# Altium PCB SolarpanelZPlus.PcbDoc
Units mm, origin at the board's own origin, x right, y up, seen from the top; angles counter-clockwise.
Board outline 80 x 60 mm, 2 copper layers (Top Layer, Bottom Layer); 2 components, 3 nets, 9 pads, 5 vias.
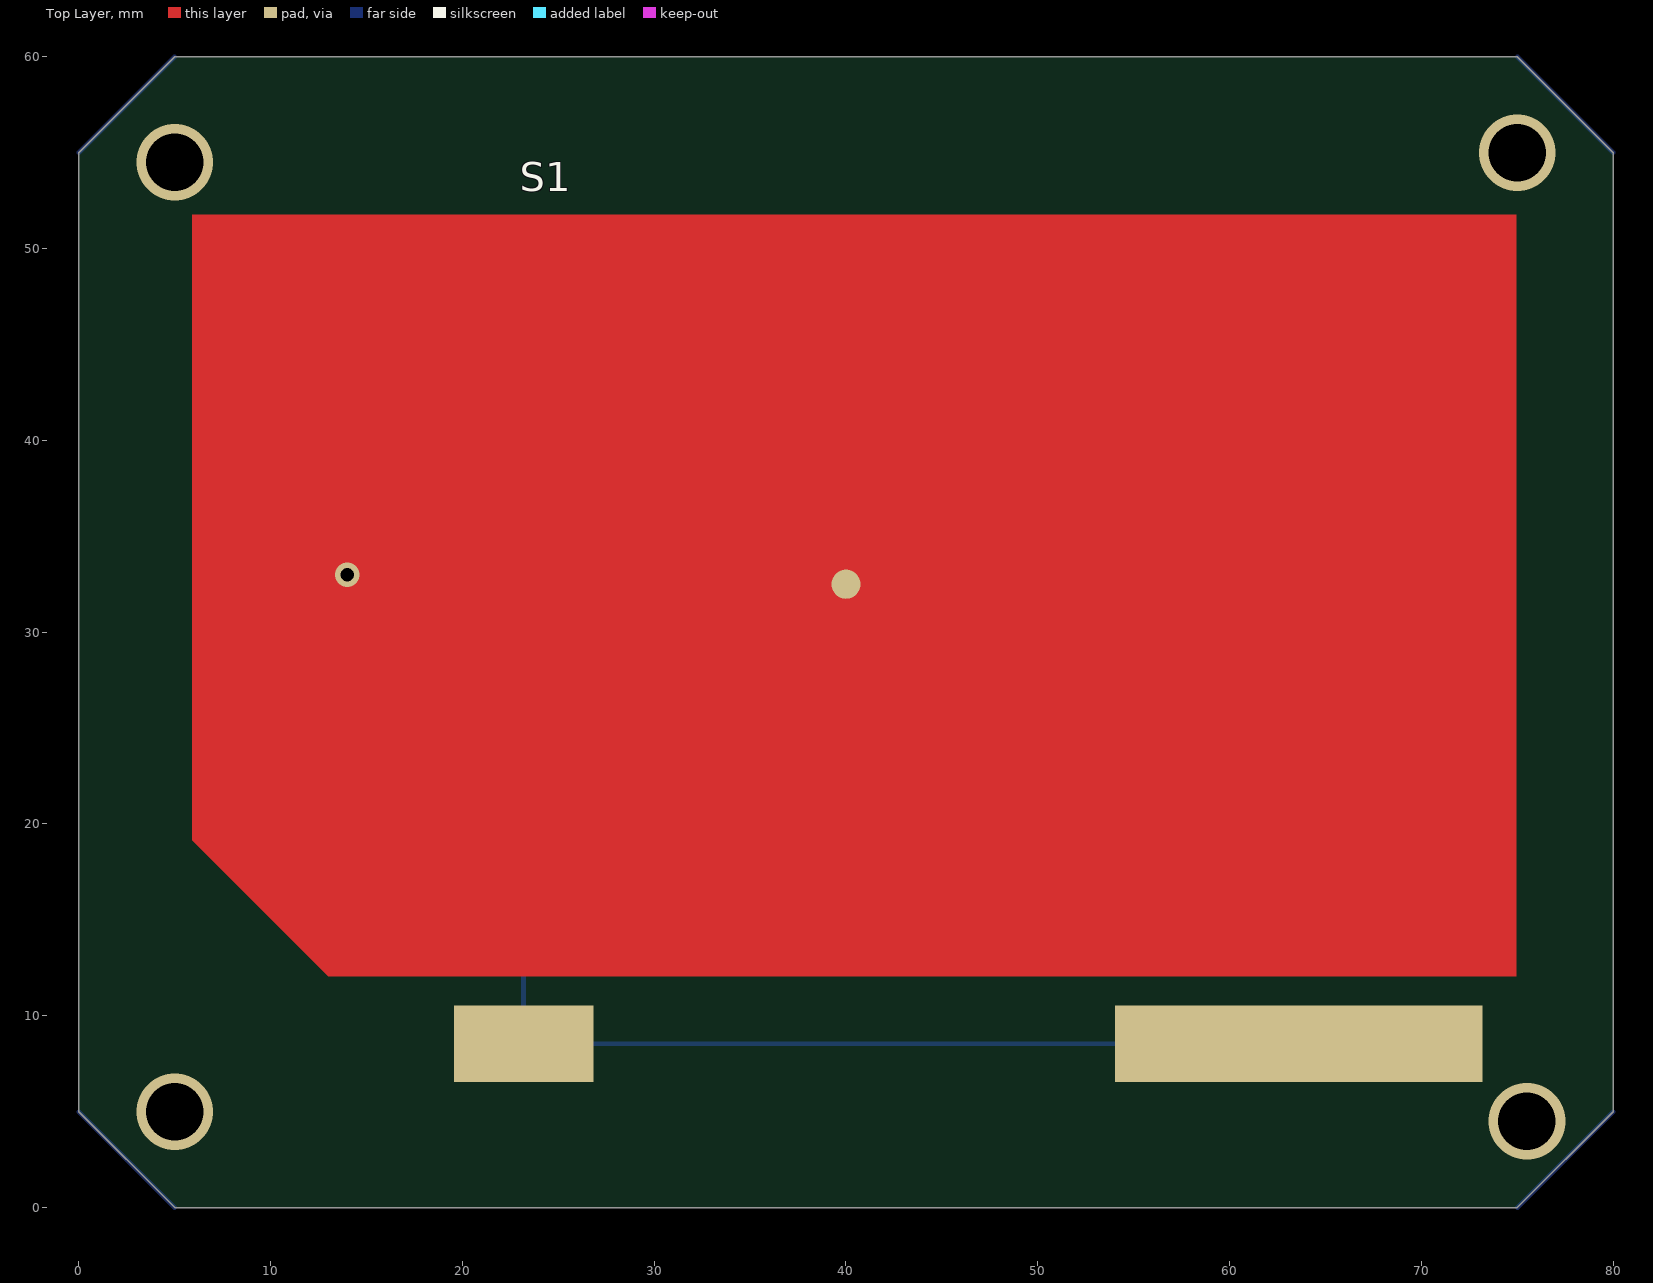
[diagram p0: Top Layer view]
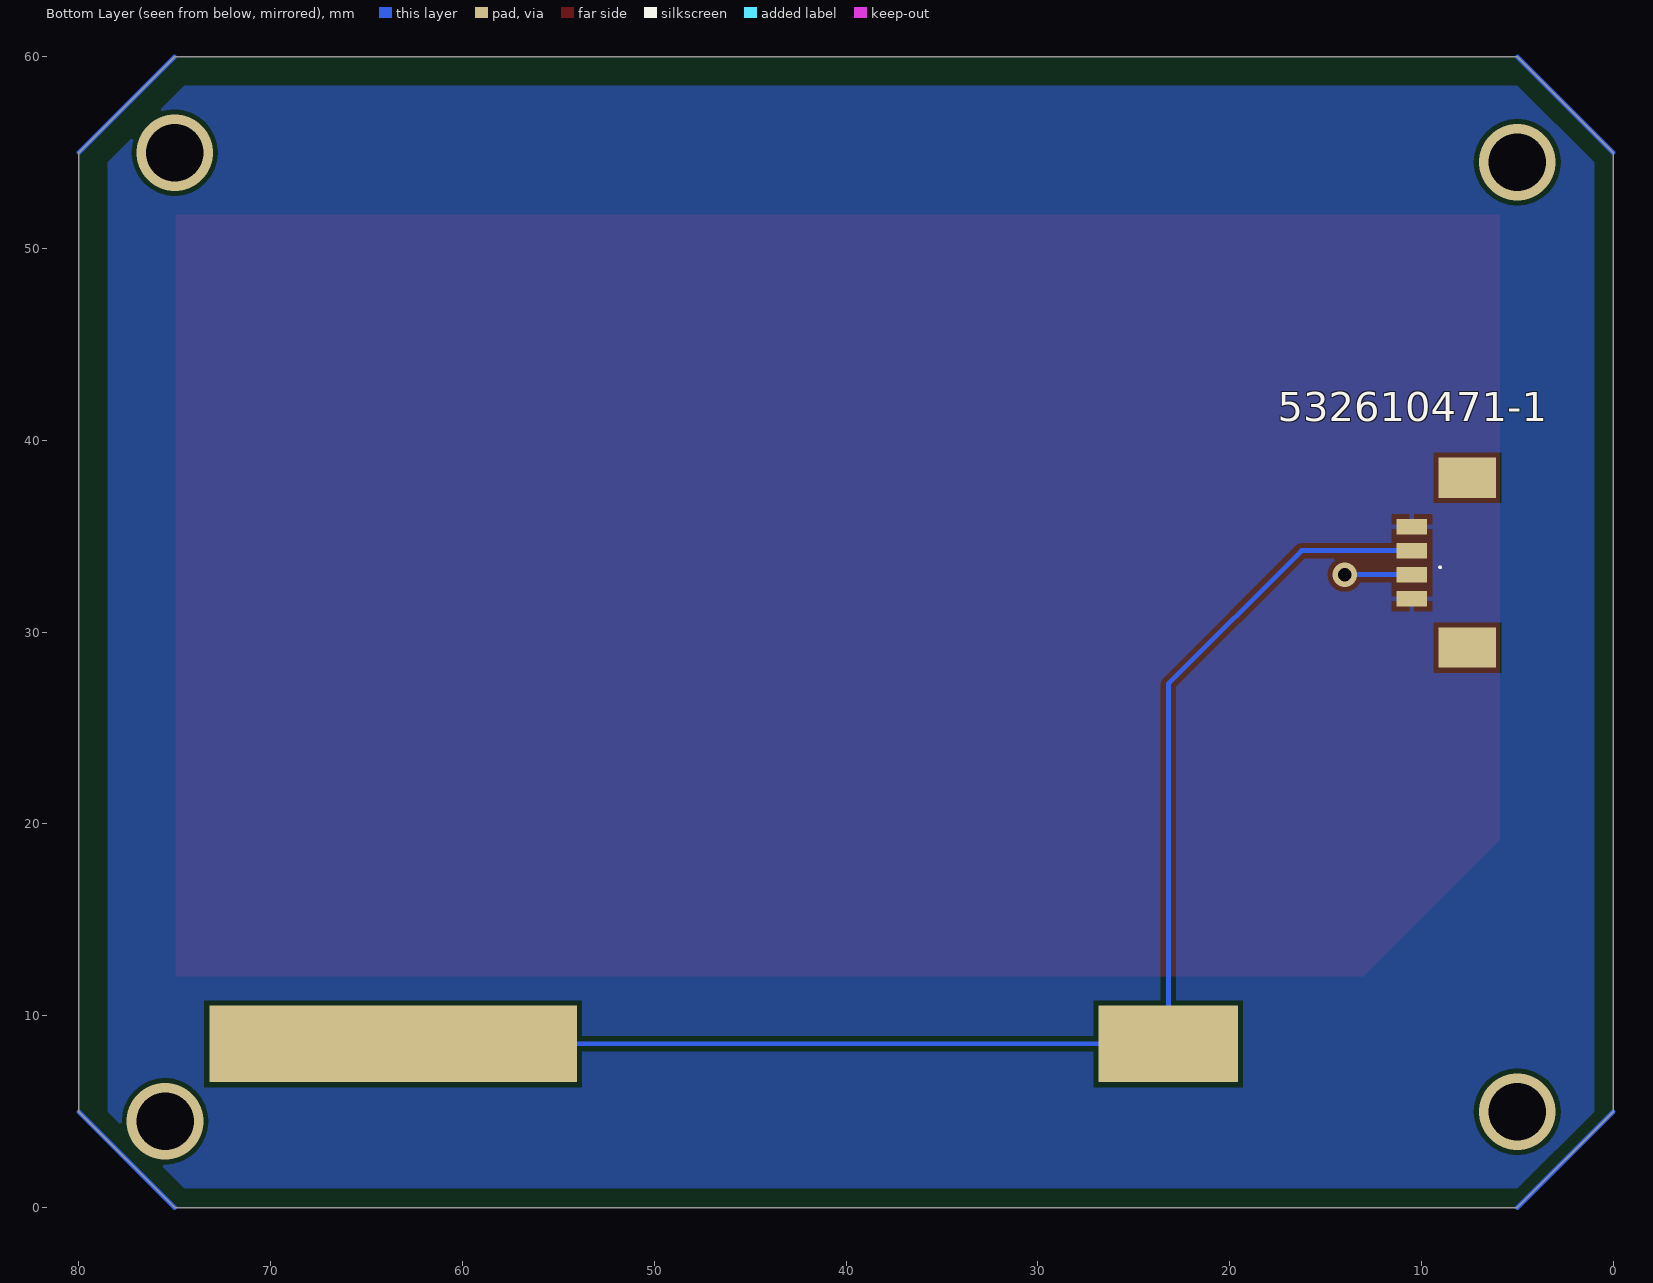
[diagram p1: Bottom Layer view, seen from below]

## Layer stack, top to bottom
Top Solder: solder mask 0.0102, Solder Resist, Dk 3.5
Top Layer: signal copper 0.0356
Dielectric 1: dielectric 0.32, FR-4, Dk 4.8
Bottom Layer: signal copper 0.0356
Bottom Solder: solder mask 0.0102, Solder Resist, Dk 3.5

## Board outline
5,0 0,5 0,55 5,60 75,60 80,55 80,5 75,0

## Design rules (kind name [scope] priority, off if disabled: settings)
Clearance [All] p1: gap=0.254 ignorepadtopadclearanceinfootprint=FALSE except(0: Arc-Hole Track-Hole SMDPad-Hole THPad-Hole Via-Hole Fill-Hole Poly-Hole Region-Hole Text-Hole)
PolygonConnect [All] p1: connectstyle=Relief reliefconductorwidth=0.254 reliefentries=4 polygonreliefangle="90 Angle" airgapwidth=0.254
RoutingVias [All] p1: holewidth=0.711 width=1.27 viastyle="Through Hole" minholewidth=0.711 minwidth=1.27 maxholewidth=0.711 maxwidth=1.27
SolderMaskExpansion [All] p1: expansion=0.102
Width [All] p1: maxlimit=0.254 minlimit=0.254 preferedwidth=0.254
30 further rules are at their usual default settings.

## Components (designator, comment, footprint, x,y, rotation, side; value= is the part's Value field where it differs from the comment)
532610471-1 "Connector 4POS Molex PicoBlade" 532610471 10.5,35.5 r0 bottom
S1 "SolAeroBJTSpaceSolarCell" SolAeroBJT 74.975,12.112 r180 top

## Footprints (in the part's own frame and the unit in brackets; to place one, negate y for a bottom-side part, rotate by r counter-clockwise, add the part's x,y. Pads: shape width x height; smd on the part's side, far side on the other; paste and mask are expansions set on the pad)
532610471 [mm] "Connector 4POS Molex PicoBlade"
  rect 1.6x0.8 smd: 1(0,3.75) 2(0,2.5) 3(0,1.25) 4(0,0)
  rect 3x2.1 smd: ""(-2.9,-2.55) ""(-2.9,6.3)
  silkscreen extent -1.52,2.07 -1.42,2.17, body extent -4.71,-3.81 1.02,7.56, height 0.6
SolAeroBJT [mm] "Solar Cell"
  round 1.524 smd: 1(34.975,-20.388)
  rect 19.16x4 all layers, no hole: 2(11.36,3.57)
  rect 7.26x4 all layers, no hole: 2(51.78,3.57)
  Top Layer region: 69.066,-7.058 69.066,-7.053 61.956,0.057 61.942,0.043 0.043,0.043 0.043,-39.639 69.066,-39.639

## Part data
532610471-1: library part 532610471

## Via types
v1: diameter 4, hole 3, Top Layer to Bottom Layer, 4 vias
v2: diameter 1.27, hole 0.711, Top Layer to Bottom Layer, 1 vias

## Nets (pads, with @x,y where several pads share a name; then routed paths per layer and width w, separated by ;. In a path a pad name is that pad's centre, name@x,y a point inside that pad or via, vN(x,y) a via of type N, cw(c..) or ccw(c..) an arc to the next point about the centre after c; other vN are vias at no path point)
"C1 VL": 532610471-1.3 S1.2 | length 74.8
  Bottom Layer w0.254: 532610471-1.3 16.25,34.25 23.195,27.305 23.195,8.542 S1.2@63.615,8.542
"C1 VSC": 532610471-1.2 S1.1 | length 3.5
  Bottom Layer w0.254: 532610471-1.2 v2(14,33)
GND: 532610471-1.1 532610471-1.4
pads on no net: 532610471-1.
copper on no net: | length 28.3
  Bottom Layer w0.254: 0,5 5,0 ; 0,55 5,60 ; 75,0 80,5 ; 75,60 80,55
  other v1: 75.5,4.5 5,5 5,54.5 75,55

## Polygon pours and split planes (outlines as drawn)
GND on Bottom Layer "Bottom Layer-GND" (solid, pour order 12): 1,54.5 5,58.5 74.5,58.5 78.5,54.5 78.5,5 74.5,1 5,1 1,5

## Silkscreen, mask and mechanical layers (free items; w line width, h text height)
Mechanical 1:
  lines w0.254: 0,5 0,55 ; 5,0 75,0 ; 5,60 75,60 ; 80,5 80,55